# Altium PCB Main_Board - 06162023 - RevA.PcbDoc (part 2 of 2)
Units mil, origin at the board's own origin, x right, y up, seen from the top; angles counter-clockwise.
Board outline 8721.46 x 3937.01 mil, 4 copper layers (Top Layer, Layer 2, Layer 3, Bottom Layer), stack 22.378 mil thick; 18 components, 31 nets, 221 pads, 55 vias.
Unrouted connection lines stored in the file: 4.
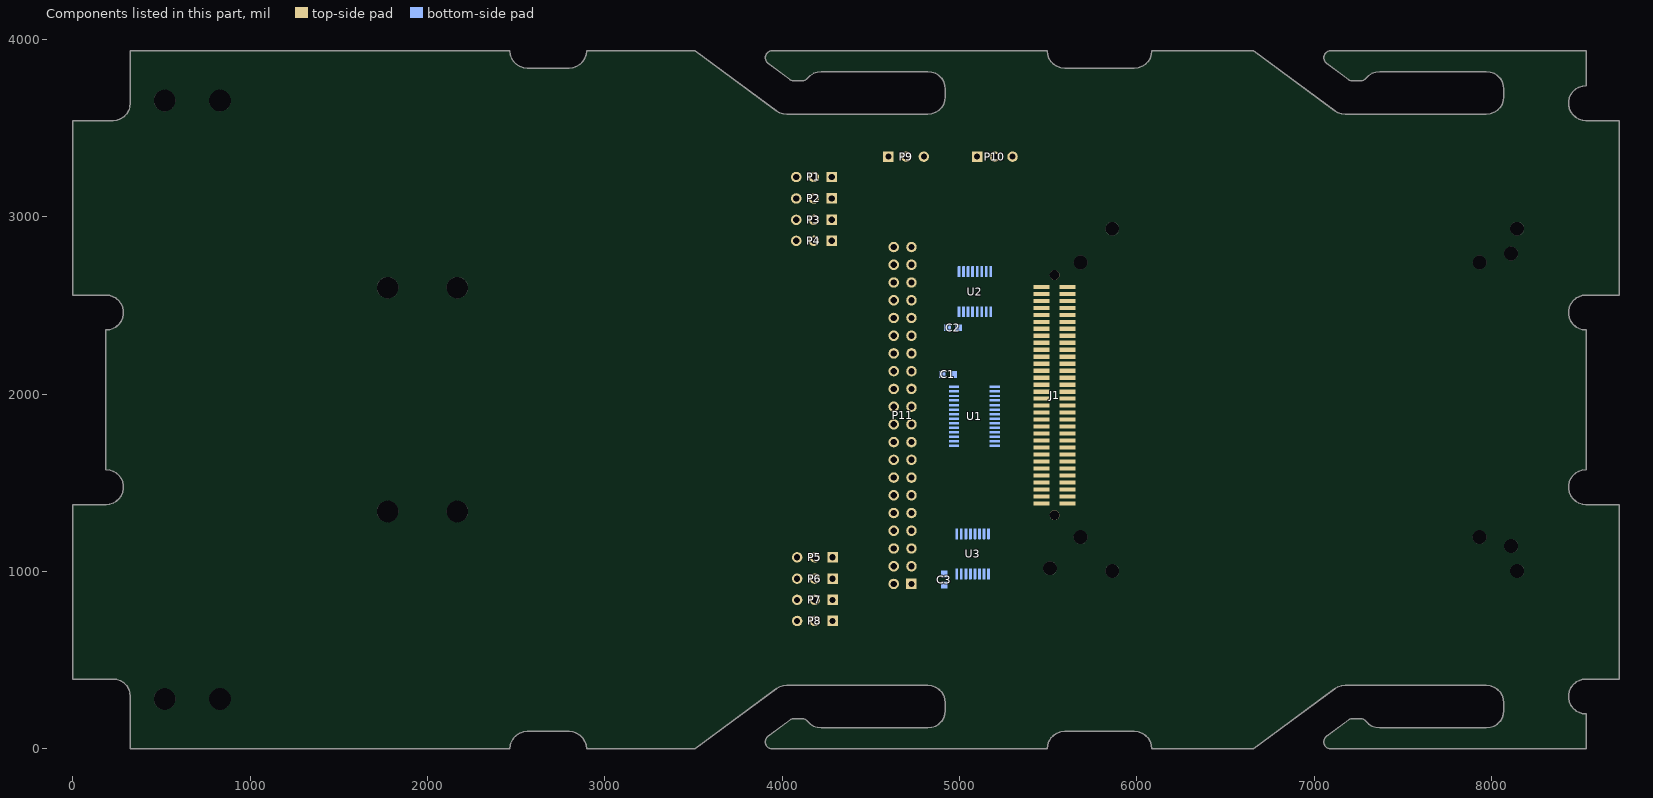
[diagram p4: the components of this part, seen from the top]

## Silkscreen, mask and mechanical layers (free items; w line width, h text height)
Top Overlay:
  drawing of 95 lines, arcs and shapes, not listed
  text "SEL_PWM" at 4523.39,3420.84 h50
  text "EN_PWM" at 5028.39,3405.84 h50
  text "-" at 4790,3233.46 h60
  text "+" at 4585,3228.78 h60
  text "+" at 5085,3223.78 h60
  text "-" at 5290,3223.46 h60
  text "SIG" at 4319.99,2635 h50 r90
  text "GND" at 4104.99,2630 h50 r90
  text "APRILab / Main_Board - 06162023 - RevA / Ethan Reussow" at 1745,1837.37 h50
  text "SIG" at 4329.99,1180 h50 r90
  text "GND" at 4114.99,1175 h50 r90
Mechanical 1:
  lines w10: 2755,14425 2800,14470 2800,14555

## Text inside footprints (layer, text, board x,y; h text height)
P11: Top Overlay "39" at 4750,2910 h50 r90; Top Overlay "40" at 4650,2910 h50 r90; Top Overlay "2" at 4650,830 h50 r90; Top Overlay "1" at 4750,830 h50 r90